# Altium PCB ISC.PcbDoc (part 2 of 3)
Units mm, origin at the board's own origin, x right, y up, seen from the top; angles counter-clockwise.
Board outline 152.4 x 101.6 mm, 2 copper layers (Top Layer, Bottom Layer); 689 components, 715 nets, 2378 pads, 0 vias.
Unrouted connection lines stored in the file: 1379.
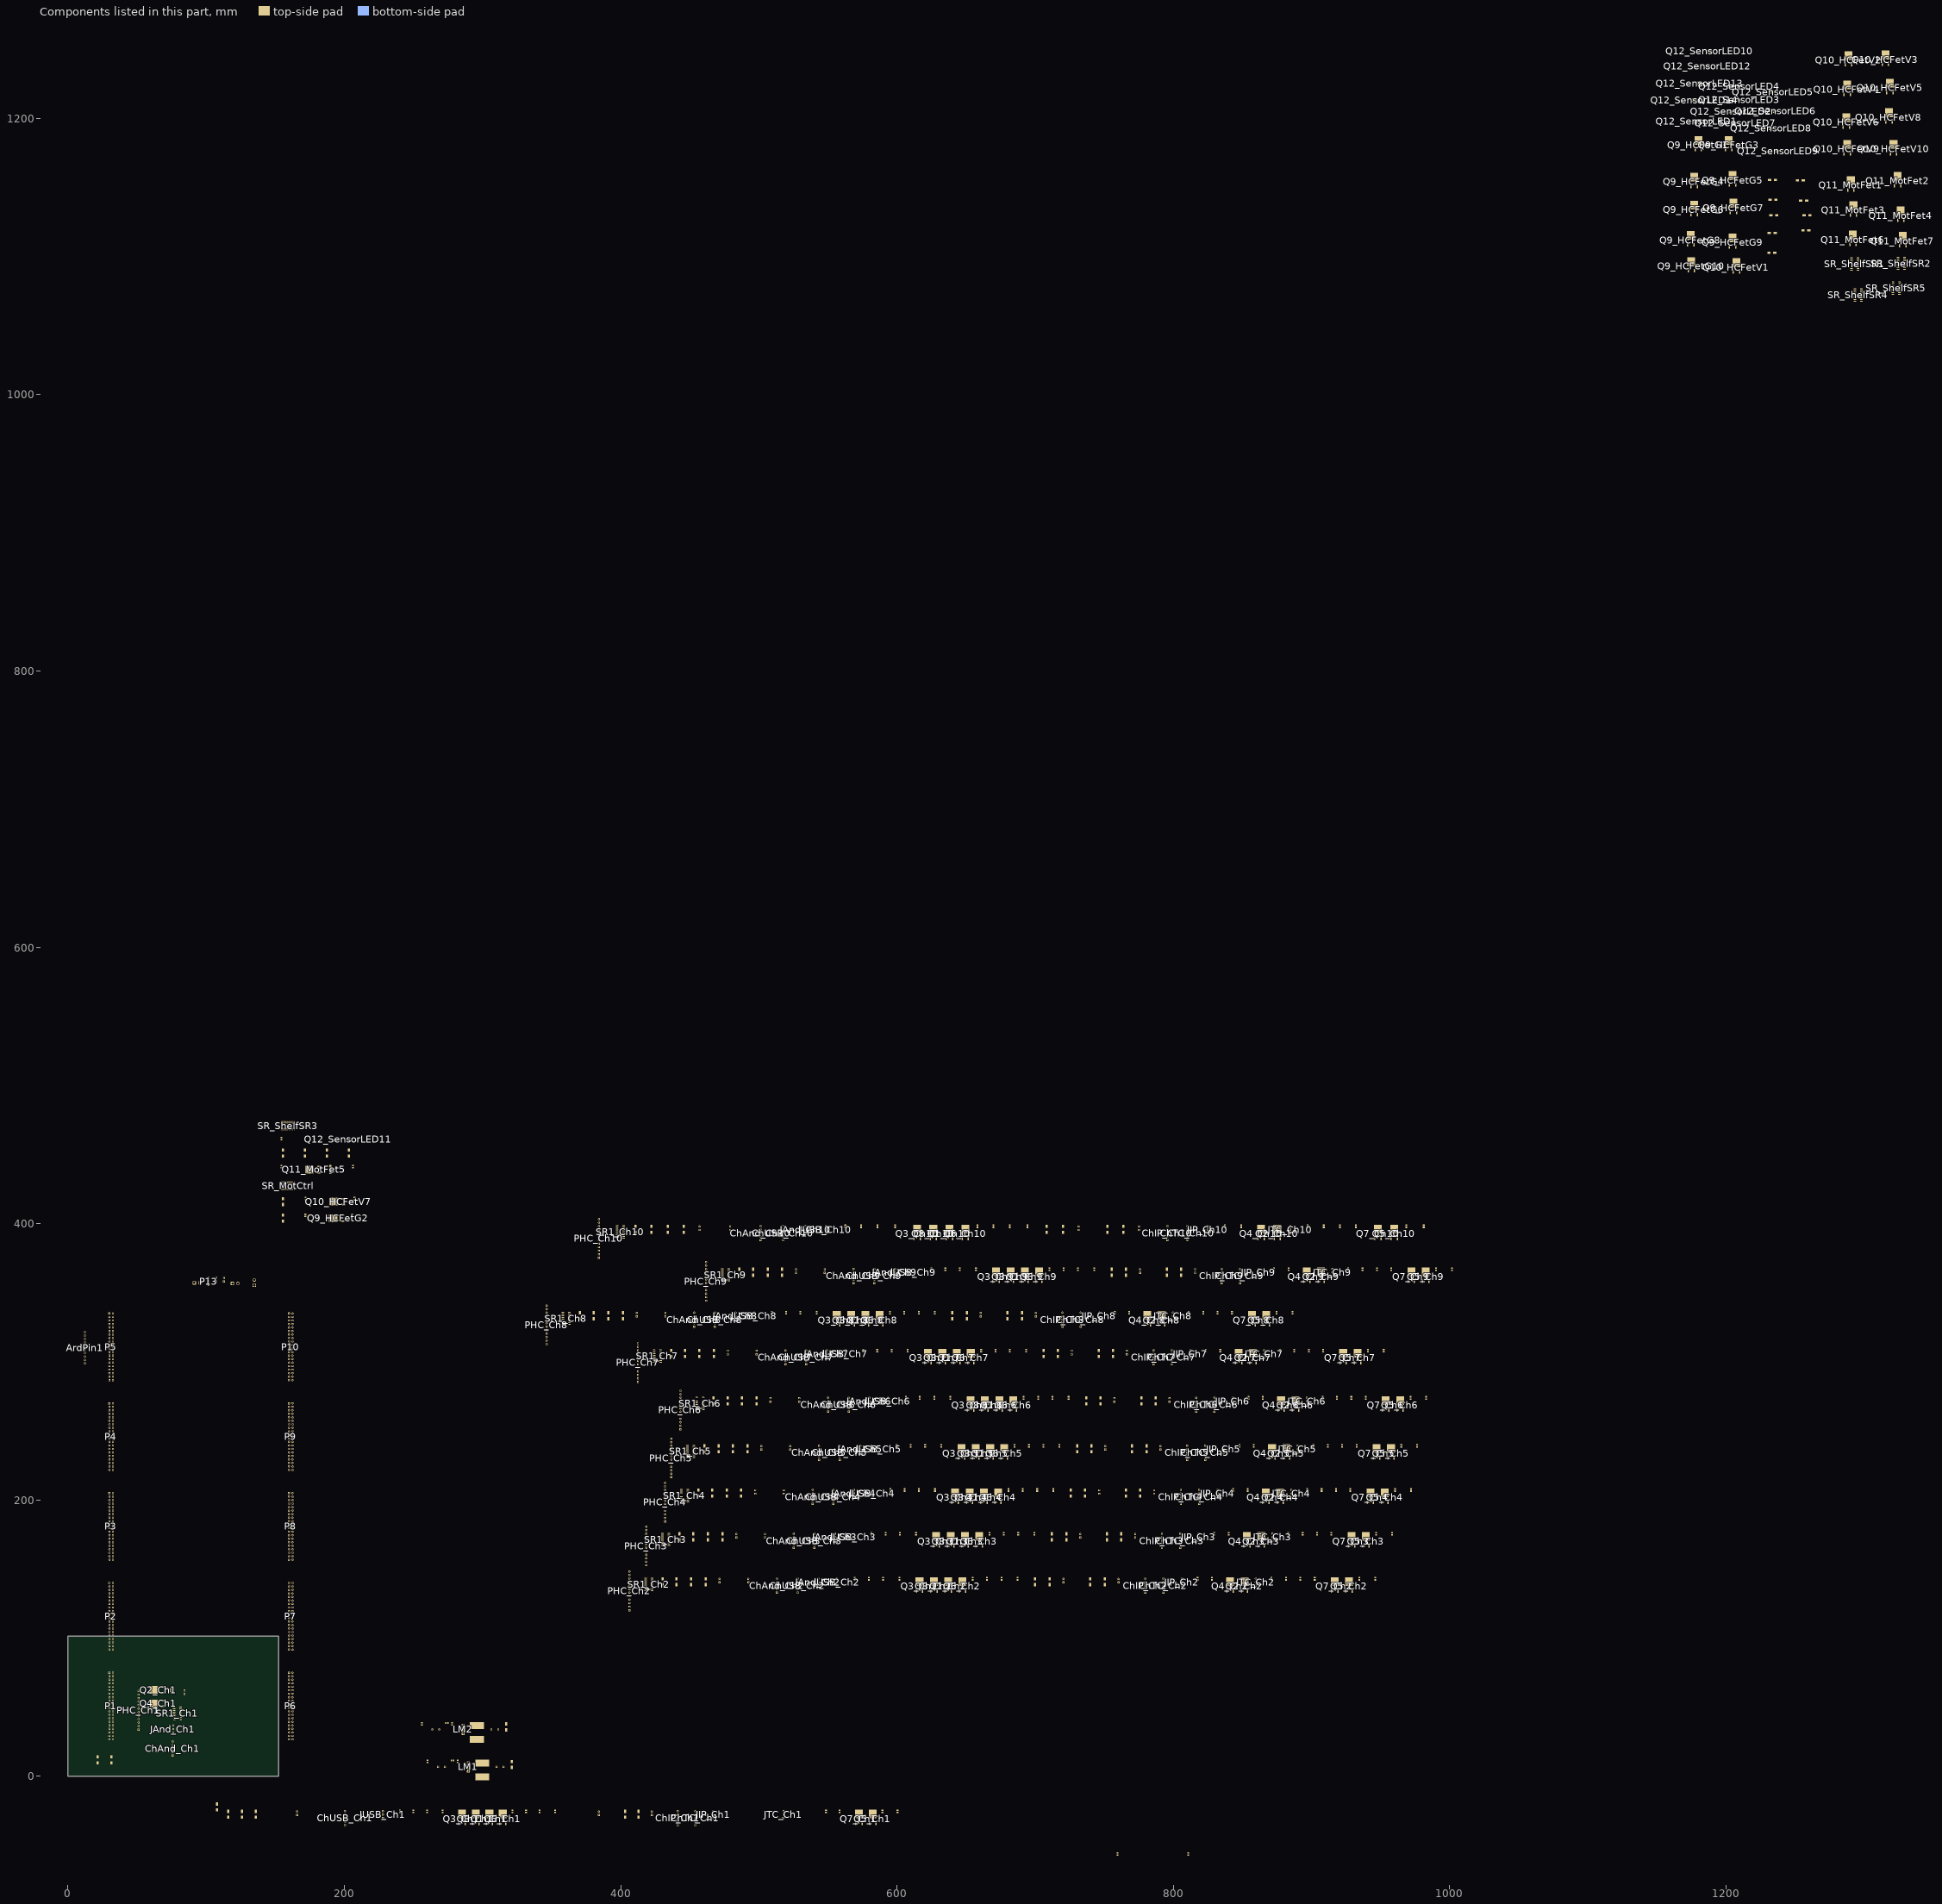
[diagram p2: the components of this part, seen from the top]

## Components (designator, comment, footprint, x,y, rotation, side; value= is the part's Value field where it differs from the comment) (continued)
P9 "Header 20X2" HDR2X20 160,270 r270 top locked
P10 "Header 20X2" HDR2X20 160,335 r270 top locked
P11 "Arduino5V" HDR1X2 112.984,358.22 r90 top
P12 "OrangePi5V" HDR1X2 107.396,358.22 r90 top
P13 "DriverJumper" HDR1X3 101.808,355.68 r90 top
PHC_Ch1 "Header 12" HDR1X12 51.2,33.8 r90 top (schematic designator PHC)
PHC_Ch2 "Header 12" HDR1X12 406.358,120.267 r90 top (schematic designator PHC)
PHC_Ch3 "Header 12" HDR1X12 418.472,152.767 r90 top (schematic designator PHC)
PHC_Ch4 "Header 12" HDR1X12 432.172,184.467 r90 top (schematic designator PHC)
PHC_Ch5 "Header 12" HDR1X12 436.675,216.452 r90 top (schematic designator PHC)
PHC_Ch6 "Header 12" HDR1X12 443.272,251.167 r90 top (schematic designator PHC)
PHC_Ch7 "Header 12" HDR1X12 412.472,285.467 r90 top (schematic designator PHC)
PHC_Ch8 "Header 12" HDR1X12 346.458,312.767 r90 top (schematic designator PHC)
PHC_Ch9 "Header 12" HDR1X12 461.793,344.3 r90 top (schematic designator PHC)
PHC_Ch10 "Header 12" HDR1X12 384.327,375.366 r90 top (schematic designator PHC)
Q1_Ch1 "PHD45N03" *DPAK228P998X235-3N 304.992,-29.718 r0 top (schematic designator Q1)
Q1_Ch2 "PHD45N03" *DPAK228P998X235-3N 637.117,138.555 r0 top (schematic designator Q1)
Q1_Ch3 "PHD45N03" *DPAK228P998X235-3N 649.231,171.055 r0 top (schematic designator Q1)
Q1_Ch4 "PHD45N03" *DPAK228P998X235-3N 662.931,202.755 r0 top (schematic designator Q1)
Q1_Ch5 "PHD45N03" *DPAK228P998X235-3N 667.434,234.74 r0 top (schematic designator Q1)
Q1_Ch6 "PHD45N03" *DPAK228P998X235-3N 674.031,269.455 r0 top (schematic designator Q1)
Q1_Ch7 "PHD45N03" *DPAK228P998X235-3N 643.231,303.755 r0 top (schematic designator Q1)
Q1_Ch8 "PHD45N03" *DPAK228P998X235-3N 577.217,331.055 r0 top (schematic designator Q1)
Q1_Ch9 "PHD45N03" *DPAK228P998X235-3N 692.552,362.588 r0 top (schematic designator Q1)
Q1_Ch10 "PHD45N03" *DPAK228P998X235-3N 637.946,393.654 r0 top (schematic designator Q1)
Q2_Ch1 "PHD45N03" *DPAK228P998X235-3N 64.5,62.6 r90 top (schematic designator Q2)
Q2_Ch2 "PHD45N03" *DPAK228P998X235-3N 851.493,138.555 r0 top (schematic designator Q2)
Q2_Ch3 "PHD45N03" *DPAK228P998X235-3N 863.607,171.055 r0 top (schematic designator Q2)
Q2_Ch4 "PHD45N03" *DPAK228P998X235-3N 877.307,202.755 r0 top (schematic designator Q2)
Q2_Ch5 "PHD45N03" *DPAK228P998X235-3N 881.81,234.74 r0 top (schematic designator Q2)
Q2_Ch6 "PHD45N03" *DPAK228P998X235-3N 888.407,269.455 r0 top (schematic designator Q2)
Q2_Ch7 "PHD45N03" *DPAK228P998X235-3N 857.607,303.755 r0 top (schematic designator Q2)
Q2_Ch8 "PHD45N03" *DPAK228P998X235-3N 791.593,331.055 r0 top (schematic designator Q2)
Q2_Ch9 "PHD45N03" *DPAK228P998X235-3N 906.928,362.588 r0 top (schematic designator Q2)
Q2_Ch10 "PHD45N03" *DPAK228P998X235-3N 875.182,393.654 r0 top (schematic designator Q2)
Q3_Ch1 "PHD45N03" *DPAK228P998X235-3N 285.18,-29.718 r0 top (schematic designator Q3)
Q3_Ch2 "PHD45N03" *DPAK228P998X235-3N 616.289,138.555 r0 top (schematic designator Q3)
Q3_Ch3 "PHD45N03" *DPAK228P998X235-3N 628.403,171.055 r0 top (schematic designator Q3)
Q3_Ch4 "PHD45N03" *DPAK228P998X235-3N 642.103,202.755 r0 top (schematic designator Q3)
Q3_Ch5 "PHD45N03" *DPAK228P998X235-3N 646.606,234.74 r0 top (schematic designator Q3)
Q3_Ch6 "PHD45N03" *DPAK228P998X235-3N 653.203,269.455 r0 top (schematic designator Q3)
Q3_Ch7 "PHD45N03" *DPAK228P998X235-3N 622.403,303.755 r0 top (schematic designator Q3)
Q3_Ch8 "PHD45N03" *DPAK228P998X235-3N 556.389,331.055 r0 top (schematic designator Q3)
Q3_Ch9 "PHD45N03" *DPAK228P998X235-3N 671.724,362.588 r0 top (schematic designator Q3)
Q3_Ch10 "PHD45N03" *DPAK228P998X235-3N 614.578,393.654 r0 top (schematic designator Q3)
Q4_Ch1 "PHD45N03" *DPAK228P998X235-3N 64.5,52.7 r90 top (schematic designator Q4)
Q4_Ch2 "PHD45N03" *DPAK228P998X235-3N 841.079,138.555 r0 top (schematic designator Q4)
Q4_Ch3 "PHD45N03" *DPAK228P998X235-3N 853.193,171.055 r0 top (schematic designator Q4)
Q4_Ch4 "PHD45N03" *DPAK228P998X235-3N 866.893,202.755 r0 top (schematic designator Q4)
Q4_Ch5 "PHD45N03" *DPAK228P998X235-3N 871.396,234.74 r0 top (schematic designator Q4)
Q4_Ch6 "PHD45N03" *DPAK228P998X235-3N 877.993,269.455 r0 top (schematic designator Q4)
Q4_Ch7 "PHD45N03" *DPAK228P998X235-3N 847.193,303.755 r0 top (schematic designator Q4)
Q4_Ch8 "PHD45N03" *DPAK228P998X235-3N 781.179,331.055 r0 top (schematic designator Q4)
Q4_Ch9 "PHD45N03" *DPAK228P998X235-3N 896.514,362.588 r0 top (schematic designator Q4)
Q4_Ch10 "PHD45N03" *DPAK228P998X235-3N 863.498,393.654 r0 top (schematic designator Q4)
Q5_Ch1 "PHD45N03" *DPAK228P998X235-3N 582.36,-29.718 r0 top (schematic designator Q5)
Q5_Ch2 "PHD45N03" *DPAK228P998X235-3N 927.185,138.555 r0 top (schematic designator Q5)
Q5_Ch3 "PHD45N03" *DPAK228P998X235-3N 939.299,171.055 r0 top (schematic designator Q5)
Q5_Ch4 "PHD45N03" *DPAK228P998X235-3N 952.999,202.755 r0 top (schematic designator Q5)
Q5_Ch5 "PHD45N03" *DPAK228P998X235-3N 957.502,234.74 r0 top (schematic designator Q5)
Q5_Ch6 "PHD45N03" *DPAK228P998X235-3N 964.099,269.455 r0 top (schematic designator Q5)
Q5_Ch7 "PHD45N03" *DPAK228P998X235-3N 933.299,303.755 r0 top (schematic designator Q5)
Q5_Ch8 "PHD45N03" *DPAK228P998X235-3N 867.285,331.055 r0 top (schematic designator Q5)
Q5_Ch9 "PHD45N03" *DPAK228P998X235-3N 982.62,362.588 r0 top (schematic designator Q5)
Q5_Ch10 "PHD45N03" *DPAK228P998X235-3N 959.764,393.654 r0 top (schematic designator Q5)
Q6_Ch1 "PHD45N03" *DPAK228P998X235-3N 314.644,-29.718 r0 top (schematic designator Q6)
Q6_Ch2 "PHD45N03" *DPAK228P998X235-3N 647.277,138.555 r0 top (schematic designator Q6)
Q6_Ch3 "PHD45N03" *DPAK228P998X235-3N 659.391,171.055 r0 top (schematic designator Q6)
Q6_Ch4 "PHD45N03" *DPAK228P998X235-3N 673.091,202.755 r0 top (schematic designator Q6)
Q6_Ch5 "PHD45N03" *DPAK228P998X235-3N 677.594,234.74 r0 top (schematic designator Q6)
Q6_Ch6 "PHD45N03" *DPAK228P998X235-3N 684.191,269.455 r0 top (schematic designator Q6)
Q6_Ch7 "PHD45N03" *DPAK228P998X235-3N 653.391,303.755 r0 top (schematic designator Q6)
Q6_Ch8 "PHD45N03" *DPAK228P998X235-3N 587.377,331.055 r0 top (schematic designator Q6)
Q6_Ch9 "PHD45N03" *DPAK228P998X235-3N 702.712,362.588 r0 top (schematic designator Q6)
Q6_Ch10 "PHD45N03" *DPAK228P998X235-3N 649.376,393.654 r0 top (schematic designator Q6)
Q7_Ch1 "PHD45N03" *DPAK228P998X235-3N 572.454,-29.718 r0 top (schematic designator Q7)
Q7_Ch2 "PHD45N03" *DPAK228P998X235-3N 916.771,138.555 r0 top (schematic designator Q7)
Q7_Ch3 "PHD45N03" *DPAK228P998X235-3N 928.885,171.055 r0 top (schematic designator Q7)
Q7_Ch4 "PHD45N03" *DPAK228P998X235-3N 942.585,202.755 r0 top (schematic designator Q7)
Q7_Ch5 "PHD45N03" *DPAK228P998X235-3N 947.088,234.74 r0 top (schematic designator Q7)
Q7_Ch6 "PHD45N03" *DPAK228P998X235-3N 953.685,269.455 r0 top (schematic designator Q7)
Q7_Ch7 "PHD45N03" *DPAK228P998X235-3N 922.885,303.755 r0 top (schematic designator Q7)
Q7_Ch8 "PHD45N03" *DPAK228P998X235-3N 856.871,331.055 r0 top (schematic designator Q7)
Q7_Ch9 "PHD45N03" *DPAK228P998X235-3N 972.206,362.588 r0 top (schematic designator Q7)
Q7_Ch10 "PHD45N03" *DPAK228P998X235-3N 948.08,393.654 r0 top (schematic designator Q7)
Q8_Ch1 "PHD45N03" *DPAK228P998X235-3N 295.086,-29.718 r0 top (schematic designator Q8)
Q8_Ch2 "PHD45N03" *DPAK228P998X235-3N 626.703,138.555 r0 top (schematic designator Q8)
Q8_Ch3 "PHD45N03" *DPAK228P998X235-3N 638.817,171.055 r0 top (schematic designator Q8)
Q8_Ch4 "PHD45N03" *DPAK228P998X235-3N 652.517,202.755 r0 top (schematic designator Q8)
Q8_Ch5 "PHD45N03" *DPAK228P998X235-3N 657.02,234.74 r0 top (schematic designator Q8)
Q8_Ch6 "PHD45N03" *DPAK228P998X235-3N 663.617,269.455 r0 top (schematic designator Q8)
Q8_Ch7 "PHD45N03" *DPAK228P998X235-3N 632.817,303.755 r0 top (schematic designator Q8)
Q8_Ch8 "PHD45N03" *DPAK228P998X235-3N 566.803,331.055 r0 top (schematic designator Q8)
Q8_Ch9 "PHD45N03" *DPAK228P998X235-3N 682.138,362.588 r0 top (schematic designator Q8)
Q8_Ch10 "PHD45N03" *DPAK228P998X235-3N 626.262,393.654 r0 top (schematic designator Q8)
Q9_HCFetG1 "PHD45N03" *DPAK228P998X235-3N 1179.944,1181.595 r0 top (schematic designator Q9)
Q9_HCFetG2 "PHD45N03" *DPAK228P998X235-3N 194.437,403.987 r90 top (schematic designator Q9)
Q9_HCFetG3 "PHD45N03" *DPAK228P998X235-3N 1201.915,1181.595 r0 top (schematic designator Q9)
Q9_HCFetG4 "PHD45N03" *DPAK228P998X235-3N 1176.896,1155.052 r0 top (schematic designator Q9)
Q9_HCFetG5 "PHD45N03" *DPAK228P998X235-3N 1204.709,1156.068 r0 top (schematic designator Q9)
Q9_HCFetG6 "PHD45N03" *DPAK228P998X235-3N 1176.896,1134.732 r0 top (schematic designator Q9)
Q9_HCFetG7 "PHD45N03" *DPAK228P998X235-3N 1205.344,1136.129 r0 top (schematic designator Q9)
Q9_HCFetG8 "PHD45N03" *DPAK228P998X235-3N 1174.356,1112.761 r0 top (schematic designator Q9)
Q9_HCFetG9 "PHD45N03" *DPAK228P998X235-3N 1204.709,1111.11 r0 top (schematic designator Q9)
Q9_HCFetG10 "PHD45N03" *DPAK228P998X235-3N 1174.864,1093.965 r0 top (schematic designator Q9)
Q10_HCFetV1 "PHD45N03" *DPAK228P998X235-3N 1207.503,1093.076 r0 top (schematic designator Q10)
Q10_HCFetV2 "PHD45N03" *DPAK228P998X235-3N 1288.656,1243.063 r0 top (schematic designator Q10)
Q10_HCFetV3 "PHD45N03" *DPAK228P998X235-3N 1315.326,1243.444 r0 top (schematic designator Q10)
Q10_HCFetV4 "PHD45N03" *DPAK228P998X235-3N 1287.589,1221.74 r0 top (schematic designator Q10)
Q10_HCFetV5 "PHD45N03" *DPAK228P998X235-3N 1318.577,1223.01 r0 top (schematic designator Q10)
Q10_HCFetV6 "PHD45N03" *DPAK228P998X235-3N 1287.081,1198.118 r0 top (schematic designator Q10)
Q10_HCFetV7 "PHD45N03" *DPAK228P998X235-3N 194.945,415.925 r90 top (schematic designator Q10)
Q10_HCFetV8 "PHD45N03" *DPAK228P998X235-3N 1317.866,1201.661 r0 top (schematic designator Q10)
Q10_HCFetV9 "PHD45N03" *DPAK228P998X235-3N 1287.589,1178.687 r0 top (schematic designator Q10)
Q10_HCFetV10 "PHD45N03" *DPAK228P998X235-3N 1321.168,1178.674 r0 top (schematic designator Q10)
Q11_MotFet1 "PHD45N03" *DPAK228P998X235-3N 1290.307,1152.512 r0 top (schematic designator Q11)
Q11_MotFet2 "PHD45N03" *DPAK228P998X235-3N 1324.165,1155.573 r0 top (schematic designator Q11)
Q11_MotFet3 "PHD45N03" *DPAK228P998X235-3N 1292.161,1134.364 r0 top (schematic designator Q11)
Q11_MotFet4 "PHD45N03" *DPAK228P998X235-3N 1326.451,1130.554 r0 top (schematic designator Q11)
Q11_MotFet5 "PHD45N03" *DPAK228P998X235-3N 177.165,439.166 r90 top (schematic designator Q11)
Q11_MotFet6 "PHD45N03" *DPAK228P998X235-3N 1291.831,1113.015 r0 top (schematic designator Q11)
Q11_MotFet7 "PHD45N03" *DPAK228P998X235-3N 1327.899,1112.126 r0 top (schematic designator Q11)
Q12_SensorLED1 "s9018" SOT-23_N 1178.547,1197.724 r0 top (schematic designator Q12)
Q12_SensorLED2 "s9018" SOT-23_N 1203.693,1204.963 r0 top (schematic designator Q12)
Q12_SensorLED3 "s9018" SOT-23_N 1209.408,1213.345 r0 top (schematic designator Q12)
Q12_SensorLED4 "s9018" SOT-23_N 1209.408,1222.997 r0 top (schematic designator Q12)
Q12_SensorLED5 "s9018" SOT-23_N 1233.919,1219.06 r0 top (schematic designator Q12)
Q12_SensorLED6 "s9018" SOT-23_N 1235.697,1205.217 r0 top (schematic designator Q12)
Q12_SensorLED7 "s9018" SOT-23_N 1206.868,1196.708 r0 top (schematic designator Q12)
Q12_SensorLED8 "s9018" SOT-23_N 1232.649,1192.771 r0 top (schematic designator Q12)
Q12_SensorLED9 "s9018" SOT-23_N 1237.602,1176.388 r0 top (schematic designator Q12)
Q12_SensorLED10 "s9018" SOT-23_N 1187.945,1248.651 r0 top (schematic designator Q12)
Q12_SensorLED11 "s9018" SOT-23_N 202.565,461.137 r90 top (schematic designator Q12)
Q12_SensorLED12 "s9018" SOT-23_N 1186.548,1237.602 r0 top (schematic designator Q12)
Q12_SensorLED13 "s9018" SOT-23_N 1180.833,1225.41 r0 top (schematic designator Q12)
Q12_SensorLED14 "s9018" SOT-23_N 1177.023,1213.218 r0 top (schematic designator Q12)
R1_Ch1 "R100" 6-0805_L 240.349,-25.273 r90 top value=100 (schematic designator R1)
R1_Ch2 "R100" 6-0805_L 569.426,143 r90 top value=100 (schematic designator R1)
R1_Ch3 "R100" 6-0805_L 581.54,175.5 r90 top value=100 (schematic designator R1)
R1_Ch4 "R100" 6-0805_L 595.24,207.2 r90 top value=100 (schematic designator R1)
R1_Ch5 "R100" 6-0805_L 599.743,239.185 r90 top value=100 (schematic designator R1)
R1_Ch6 "R100" 6-0805_L 606.34,273.9 r90 top value=100 (schematic designator R1)
R1_Ch7 "R100" 6-0805_L 575.54,308.2 r90 top value=100 (schematic designator R1)
R1_Ch8 "R100" 6-0805_L 509.526,335.5 r90 top value=100 (schematic designator R1)
R1_Ch9 "R100" 6-0805_L 624.861,367.033 r90 top value=100 (schematic designator R1)
R1_Ch10 "R100" 6-0805_L 562.635,398.099 r90 top value=100 (schematic designator R1)
R2_Ch1 "R100" 6-0805_L 72.5,52.6 r90 top value=100 (schematic designator R2)
R2_Ch2 "R100" 6-0805_L 817.457,143 r90 top value=100 (schematic designator R2)
R2_Ch3 "R100" 6-0805_L 829.571,175.5 r90 top value=100 (schematic designator R2)
R2_Ch4 "R100" 6-0805_L 843.271,207.2 r90 top value=100 (schematic designator R2)
R2_Ch5 "R100" 6-0805_L 847.774,239.185 r90 top value=100 (schematic designator R2)
R2_Ch6 "R100" 6-0805_L 854.371,273.9 r90 top value=100 (schematic designator R2)
R2_Ch7 "R100" 6-0805_L 823.571,308.2 r90 top value=100 (schematic designator R2)
R2_Ch8 "R100" 6-0805_L 757.557,335.5 r90 top value=100 (schematic designator R2)
R2_Ch9 "R100" 6-0805_L 872.892,367.033 r90 top value=100 (schematic designator R2)
R2_Ch10 "R100" 6-0805_L 837.336,398.099 r90 top value=100 (schematic designator R2)
R3_Ch1 "R430" 6-0805_L 321.629,-25.273 r90 top value=430 (schematic designator R3)
R3_Ch2 "R430" 6-0805_L 654.77,143 r90 top value=430 (schematic designator R3)
R3_Ch3 "R430" 6-0805_L 666.884,175.5 r90 top value=430 (schematic designator R3)
R3_Ch4 "R430" 6-0805_L 680.584,207.2 r90 top value=430 (schematic designator R3)
R3_Ch5 "R430" 6-0805_L 685.087,239.185 r90 top value=430 (schematic designator R3)
R3_Ch6 "R430" 6-0805_L 691.684,273.9 r90 top value=430 (schematic designator R3)
R3_Ch7 "R430" 6-0805_L 660.884,308.2 r90 top value=430 (schematic designator R3)
R3_Ch8 "R430" 6-0805_L 594.87,335.5 r90 top value=430 (schematic designator R3)
R3_Ch9 "R430" 6-0805_L 710.205,367.033 r90 top value=430 (schematic designator R3)
R3_Ch10 "R430" 6-0805_L 658.139,398.099 r90 top value=430 (schematic designator R3)
R4_Ch1 "R430" 6-0805_L 74.3,62.3 r270 top value=430 (schematic designator R4)
R4_Ch2 "R430" 6-0805_L 871.051,143 r90 top value=430 (schematic designator R4)
R4_Ch3 "R430" 6-0805_L 883.165,175.5 r90 top value=430 (schematic designator R4)
R4_Ch4 "R430" 6-0805_L 896.865,207.2 r90 top value=430 (schematic designator R4)
R4_Ch5 "R430" 6-0805_L 901.368,239.185 r90 top value=430 (schematic designator R4)
R4_Ch6 "R430" 6-0805_L 907.965,273.9 r90 top value=430 (schematic designator R4)
R4_Ch7 "R430" 6-0805_L 877.165,308.2 r90 top value=430 (schematic designator R4)
R4_Ch8 "R430" 6-0805_L 811.151,335.5 r90 top value=430 (schematic designator R4)
R4_Ch9 "R430" 6-0805_L 926.486,367.033 r90 top value=430 (schematic designator R4)
R4_Ch10 "R430" 6-0805_L 897.28,398.099 r90 top value=430 (schematic designator R4)
R5_Ch1 "R100" 6-0805_L 250.001,-25.273 r90 top value=100 (schematic designator R5)
R5_Ch2 "R100" 6-0805_L 579.586,143 r90 top value=100 (schematic designator R5)
R5_Ch3 "R100" 6-0805_L 591.7,175.5 r90 top value=100 (schematic designator R5)
R5_Ch4 "R100" 6-0805_L 605.4,207.2 r90 top value=100 (schematic designator R5)
R5_Ch5 "R100" 6-0805_L 609.903,239.185 r90 top value=100 (schematic designator R5)
R5_Ch6 "R100" 6-0805_L 616.5,273.9 r90 top value=100 (schematic designator R5)
R5_Ch7 "R100" 6-0805_L 585.7,308.2 r90 top value=100 (schematic designator R5)
R5_Ch8 "R100" 6-0805_L 519.686,335.5 r90 top value=100 (schematic designator R5)
R5_Ch9 "R100" 6-0805_L 635.021,367.033 r90 top value=100 (schematic designator R5)
R5_Ch10 "R100" 6-0805_L 574.065,398.099 r90 top value=100 (schematic designator R5)
R6_Ch1 "R100" 6-0805_L 759.702,-56.3 r90 top value=100 (schematic designator R6)
R6_Ch2 "R100" 6-0805_L 827.871,143 r90 top value=100 (schematic designator R6)
R6_Ch3 "R100" 6-0805_L 839.985,175.5 r90 top value=100 (schematic designator R6)
R6_Ch4 "R100" 6-0805_L 853.685,207.2 r90 top value=100 (schematic designator R6)
R6_Ch5 "R100" 6-0805_L 858.188,239.185 r90 top value=100 (schematic designator R6)
R6_Ch6 "R100" 6-0805_L 864.785,273.9 r90 top value=100 (schematic designator R6)
R6_Ch7 "R100" 6-0805_L 833.985,308.2 r90 top value=100 (schematic designator R6)
R6_Ch8 "R100" 6-0805_L 767.971,335.5 r90 top value=100 (schematic designator R6)
R6_Ch9 "R100" 6-0805_L 883.306,367.033 r90 top value=100 (schematic designator R6)
R6_Ch10 "R100" 6-0805_L 849.02,398.099 r90 top value=100 (schematic designator R6)
R7_Ch1 "R430" 6-0805_L 331.535,-25.273 r90 top value=430 (schematic designator R7)
R7_Ch2 "R430" 6-0805_L 665.184,143 r90 top value=430 (schematic designator R7)
R7_Ch3 "R430" 6-0805_L 677.298,175.5 r90 top value=430 (schematic designator R7)
R7_Ch4 "R430" 6-0805_L 690.998,207.2 r90 top value=430 (schematic designator R7)
R7_Ch5 "R430" 6-0805_L 695.501,239.185 r90 top value=430 (schematic designator R7)
R7_Ch6 "R430" 6-0805_L 702.098,273.9 r90 top value=430 (schematic designator R7)
R7_Ch7 "R430" 6-0805_L 671.298,308.2 r90 top value=430 (schematic designator R7)
R7_Ch8 "R430" 6-0805_L 605.284,335.5 r90 top value=430 (schematic designator R7)
R7_Ch9 "R430" 6-0805_L 720.619,367.033 r90 top value=430 (schematic designator R7)
R7_Ch10 "R430" 6-0805_L 669.823,398.099 r90 top value=430 (schematic designator R7)
R8_Ch1 "R430" 6-0805_L 810.756,-56.3 r90 top value=430 (schematic designator R8)
R8_Ch2 "R430" 6-0805_L 881.465,143 r90 top value=430 (schematic designator R8)
R8_Ch3 "R430" 6-0805_L 893.579,175.5 r90 top value=430 (schematic designator R8)
R8_Ch4 "R430" 6-0805_L 907.279,207.2 r90 top value=430 (schematic designator R8)
R8_Ch5 "R430" 6-0805_L 911.782,239.185 r90 top value=430 (schematic designator R8)
R8_Ch6 "R430" 6-0805_L 918.379,273.9 r90 top value=430 (schematic designator R8)
R8_Ch7 "R430" 6-0805_L 887.579,308.2 r90 top value=430 (schematic designator R8)
R8_Ch8 "R430" 6-0805_L 821.565,335.5 r90 top value=430 (schematic designator R8)
R8_Ch9 "R430" 6-0805_L 936.9,367.033 r90 top value=430 (schematic designator R8)
R8_Ch10 "R430" 6-0805_L 908.837,398.099 r90 top value=430 (schematic designator R8)
R9_Ch1 "R100" 6-0805_L 548.578,-25.273 r90 top value=100 (schematic designator R9)
R9_Ch2 "R100" 6-0805_L 891.879,143 r90 top value=100 (schematic designator R9)
R9_Ch3 "R100" 6-0805_L 903.993,175.5 r90 top value=100 (schematic designator R9)
R9_Ch4 "R100" 6-0805_L 917.693,207.2 r90 top value=100 (schematic designator R9)
R9_Ch5 "R100" 6-0805_L 922.196,239.185 r90 top value=100 (schematic designator R9)
R9_Ch6 "R100" 6-0805_L 928.793,273.9 r90 top value=100 (schematic designator R9)
R9_Ch7 "R100" 6-0805_L 897.993,308.2 r90 top value=100 (schematic designator R9)
R9_Ch8 "R100" 6-0805_L 831.979,335.5 r90 top value=100 (schematic designator R9)
R9_Ch9 "R100" 6-0805_L 947.314,367.033 r90 top value=100 (schematic designator R9)
R9_Ch10 "R100" 6-0805_L 920.521,398.099 r90 top value=100 (schematic designator R9)
R10_Ch1 "R100" 6-0805_L 259.907,-25.273 r90 top value=100 (schematic designator R10)
R10_Ch2 "R100" 6-0805_L 590,143 r90 top value=100 (schematic designator R10)
R10_Ch3 "R100" 6-0805_L 602.114,175.5 r90 top value=100 (schematic designator R10)
R10_Ch4 "R100" 6-0805_L 615.814,207.2 r90 top value=100 (schematic designator R10)
R10_Ch5 "R100" 6-0805_L 620.317,239.185 r90 top value=100 (schematic designator R10)
R10_Ch6 "R100" 6-0805_L 626.914,273.9 r90 top value=100 (schematic designator R10)
R10_Ch7 "R100" 6-0805_L 596.114,308.2 r90 top value=100 (schematic designator R10)
R10_Ch8 "R100" 6-0805_L 530.1,335.5 r90 top value=100 (schematic designator R10)
R10_Ch9 "R100" 6-0805_L 645.435,367.033 r90 top value=100 (schematic designator R10)
R10_Ch10 "R100" 6-0805_L 585.749,398.099 r90 top value=100 (schematic designator R10)
R11_Ch1 "R430" 6-0805_L 589.472,-25.273 r90 top value=430 (schematic designator R11)
R11_Ch2 "R430" 6-0805_L 934.678,143 r90 top value=430 (schematic designator R11)
R11_Ch3 "R430" 6-0805_L 946.792,175.5 r90 top value=430 (schematic designator R11)
R11_Ch4 "R430" 6-0805_L 960.492,207.2 r90 top value=430 (schematic designator R11)
R11_Ch5 "R430" 6-0805_L 964.995,239.185 r90 top value=430 (schematic designator R11)
R11_Ch6 "R430" 6-0805_L 971.592,273.9 r90 top value=430 (schematic designator R11)
R11_Ch7 "R430" 6-0805_L 940.792,308.2 r90 top value=430 (schematic designator R11)
R11_Ch8 "R430" 6-0805_L 874.778,335.5 r90 top value=430 (schematic designator R11)
R11_Ch9 "R430" 6-0805_L 990.113,367.033 r90 top value=430 (schematic designator R11)
R11_Ch10 "R430" 6-0805_L 968.527,398.099 r90 top value=430 (schematic designator R11)
R12_Ch1 "R430" 6-0805_L 341.441,-25.273 r90 top value=430 (schematic designator R12)
R12_Ch2 "R430" 6-0805_L 675.598,143 r90 top value=430 (schematic designator R12)
R12_Ch3 "R430" 6-0805_L 687.712,175.5 r90 top value=430 (schematic designator R12)
R12_Ch4 "R430" 6-0805_L 701.412,207.2 r90 top value=430 (schematic designator R12)
R12_Ch5 "R430" 6-0805_L 705.915,239.185 r90 top value=430 (schematic designator R12)
R12_Ch6 "R430" 6-0805_L 712.512,273.9 r90 top value=430 (schematic designator R12)
R12_Ch7 "R430" 6-0805_L 681.712,308.2 r90 top value=430 (schematic designator R12)
R12_Ch8 "R430" 6-0805_L 615.698,335.5 r90 top value=430 (schematic designator R12)
R12_Ch9 "R430" 6-0805_L 731.033,367.033 r90 top value=430 (schematic designator R12)
R12_Ch10 "R430" 6-0805_L 681.507,398.099 r90 top value=430 (schematic designator R12)
R13_Ch1 "R100" 6-0805_L 558.484,-25.273 r90 top value=100 (schematic designator R13)
R13_Ch2 "R100" 6-0805_L 902.293,143 r90 top value=100 (schematic designator R13)
R13_Ch3 "R100" 6-0805_L 914.407,175.5 r90 top value=100 (schematic designator R13)
R13_Ch4 "R100" 6-0805_L 928.107,207.2 r90 top value=100 (schematic designator R13)
R13_Ch5 "R100" 6-0805_L 932.61,239.185 r90 top value=100 (schematic designator R13)
R13_Ch6 "R100" 6-0805_L 939.207,273.9 r90 top value=100 (schematic designator R13)
R13_Ch7 "R100" 6-0805_L 908.407,308.2 r90 top value=100 (schematic designator R13)
R13_Ch8 "R100" 6-0805_L 842.393,335.5 r90 top value=100 (schematic designator R13)
R13_Ch9 "R100" 6-0805_L 957.728,367.033 r90 top value=100 (schematic designator R13)
R13_Ch10 "R100" 6-0805_L 932.205,398.099 r90 top value=100 (schematic designator R13)
R14_Ch1 "R100" 6-0805_L 271.083,-25.273 r90 top value=100 (schematic designator R14)
R14_Ch2 "R100" 6-0805_L 601.684,143 r90 top value=100 (schematic designator R14)
R14_Ch3 "R100" 6-0805_L 613.798,175.5 r90 top value=100 (schematic designator R14)
R14_Ch4 "R100" 6-0805_L 627.498,207.2 r90 top value=100 (schematic designator R14)
R14_Ch5 "R100" 6-0805_L 632.001,239.185 r90 top value=100 (schematic designator R14)
R14_Ch6 "R100" 6-0805_L 638.598,273.9 r90 top value=100 (schematic designator R14)
R14_Ch7 "R100" 6-0805_L 607.798,308.2 r90 top value=100 (schematic designator R14)
R14_Ch8 "R100" 6-0805_L 541.784,335.5 r90 top value=100 (schematic designator R14)
R14_Ch9 "R100" 6-0805_L 657.119,367.033 r90 top value=100 (schematic designator R14)
R14_Ch10 "R100" 6-0805_L 598.703,398.099 r90 top value=100 (schematic designator R14)
R15_Ch1 "R430" 6-0805_L 600.394,-25.273 r90 top value=430 (schematic designator R15)
R15_Ch2 "R430" 6-0805_L 946.108,143 r90 top value=430 (schematic designator R15)
R15_Ch3 "R430" 6-0805_L 958.222,175.5 r90 top value=430 (schematic designator R15)
R15_Ch4 "R430" 6-0805_L 971.922,207.2 r90 top value=430 (schematic designator R15)
R15_Ch5 "R430" 6-0805_L 976.425,239.185 r90 top value=430 (schematic designator R15)
R15_Ch6 "R430" 6-0805_L 983.022,273.9 r90 top value=430 (schematic designator R15)
R15_Ch7 "R430" 6-0805_L 952.222,308.2 r90 top value=430 (schematic designator R15)
R15_Ch8 "R430" 6-0805_L 886.208,335.5 r90 top value=430 (schematic designator R15)
R15_Ch9 "R430" 6-0805_L 1001.543,367.033 r90 top value=430 (schematic designator R15)
R15_Ch10 "R430" 6-0805_L 981.227,398.099 r90 top value=430 (schematic designator R15)
R16_Ch1 "R430" 6-0805_L 352.617,-25.273 r90 top value=430 (schematic designator R16)
R16_Ch2 "R430" 6-0805_L 687.282,143 r90 top value=430 (schematic designator R16)
R16_Ch3 "R430" 6-0805_L 699.396,175.5 r90 top value=430 (schematic designator R16)
R16_Ch4 "R430" 6-0805_L 713.096,207.2 r90 top value=430 (schematic designator R16)
R16_Ch5 "R430" 6-0805_L 717.599,239.185 r90 top value=430 (schematic designator R16)
R16_Ch6 "R430" 6-0805_L 724.196,273.9 r90 top value=430 (schematic designator R16)
R16_Ch7 "R430" 6-0805_L 693.396,308.2 r90 top value=430 (schematic designator R16)
R16_Ch8 "R430" 6-0805_L 627.382,335.5 r90 top value=430 (schematic designator R16)
R16_Ch9 "R430" 6-0805_L 742.717,367.033 r90 top value=430 (schematic designator R16)
R16_Ch10 "R430" 6-0805_L 694.461,398.099 r90 top value=430 (schematic designator R16)
R17 "1k" 6-0805_L 260.136,10.795 r90 top
R18 "1k68" 6-0805_L 281.98,10.795 r90 top
R19 "1k" 6-0805_L 256.072,37.973 r90 top
R20 "1k68" 6-0805_L 277.916,37.973 r90 top
R21_HCFetG1 "R100" 6-0805_L 1179.944,1181.595 r0 top value=100 (schematic designator R21)
R21_HCFetG2 "R100" 6-0805_L 171.831,406.146 r90 top value=100 (schematic designator R21)
R21_HCFetG3 "R100" 6-0805_L 1201.915,1181.595 r0 top value=100 (schematic designator R21)
R21_HCFetG4 "R100" 6-0805_L 1176.896,1155.052 r0 top value=100 (schematic designator R21)
R21_HCFetG5 "R100" 6-0805_L 1204.709,1156.068 r0 top value=100 (schematic designator R21)
R21_HCFetG6 "R100" 6-0805_L 1176.896,1134.732 r0 top value=100 (schematic designator R21)
R21_HCFetG7 "R100" 6-0805_L 1205.344,1136.129 r0 top value=100 (schematic designator R21)
R21_HCFetG8 "R100" 6-0805_L 1174.356,1112.761 r0 top value=100 (schematic designator R21)
R21_HCFetG9 "R100" 6-0805_L 1204.709,1111.11 r0 top value=100 (schematic designator R21)
R21_HCFetG10 "R100" 6-0805_L 1174.864,1093.965 r0 top value=100 (schematic designator R21)
R22_HCFetG1 "R430" 6-0805_L 1179.944,1181.595 r0 top value=430 (schematic designator R22)
R22_HCFetG2 "R430" 6-0805_L 205.613,406.146 r90 top value=430 (schematic designator R22)
R22_HCFetG3 "R430" 6-0805_L 1201.915,1181.595 r0 top value=430 (schematic designator R22)
R22_HCFetG4 "R430" 6-0805_L 1176.896,1155.052 r0 top value=430 (schematic designator R22)
R22_HCFetG5 "R430" 6-0805_L 1204.709,1156.068 r0 top value=430 (schematic designator R22)
R22_HCFetG6 "R430" 6-0805_L 1176.896,1134.732 r0 top value=430 (schematic designator R22)
R22_HCFetG7 "R430" 6-0805_L 1205.344,1136.129 r0 top value=430 (schematic designator R22)
R22_HCFetG8 "R430" 6-0805_L 1174.356,1112.761 r0 top value=430 (schematic designator R22)
R22_HCFetG9 "R430" 6-0805_L 1204.709,1111.11 r0 top value=430 (schematic designator R22)
R22_HCFetG10 "R430" 6-0805_L 1174.864,1093.965 r0 top value=430 (schematic designator R22)
R23_HCFetV1 "R100" 6-0805_L 1207.503,1093.076 r0 top value=100 (schematic designator R23)
R23_HCFetV2 "R100" 6-0805_L 1288.656,1243.063 r0 top value=100 (schematic designator R23)
R23_HCFetV3 "R100" 6-0805_L 1315.326,1243.444 r0 top value=100 (schematic designator R23)
R23_HCFetV4 "R100" 6-0805_L 1287.589,1221.74 r0 top value=100 (schematic designator R23)
R23_HCFetV5 "R100" 6-0805_L 1318.577,1223.01 r0 top value=100 (schematic designator R23)
R23_HCFetV6 "R100" 6-0805_L 1287.081,1198.118 r0 top value=100 (schematic designator R23)
R23_HCFetV7 "R100" 6-0805_L 172.085,418.084 r90 top value=100 (schematic designator R23)
R23_HCFetV8 "R100" 6-0805_L 1317.866,1201.661 r0 top value=100 (schematic designator R23)
R23_HCFetV9 "R100" 6-0805_L 1287.589,1178.687 r0 top value=100 (schematic designator R23)
R23_HCFetV10 "R100" 6-0805_L 1321.168,1178.674 r0 top value=100 (schematic designator R23)
R24_HCFetV1 "R430" 6-0805_L 1207.503,1093.076 r0 top value=430 (schematic designator R24)
R24_HCFetV2 "R430" 6-0805_L 1288.656,1243.063 r0 top value=430 (schematic designator R24)
R24_HCFetV3 "R430" 6-0805_L 1315.326,1243.444 r0 top value=430 (schematic designator R24)
R24_HCFetV4 "R430" 6-0805_L 1287.589,1221.74 r0 top value=430 (schematic designator R24)
R24_HCFetV5 "R430" 6-0805_L 1318.577,1223.01 r0 top value=430 (schematic designator R24)
R24_HCFetV6 "R430" 6-0805_L 1287.081,1198.118 r0 top value=430 (schematic designator R24)
R24_HCFetV7 "R430" 6-0805_L 207.391,418.084 r90 top value=430 (schematic designator R24)
R24_HCFetV8 "R430" 6-0805_L 1317.866,1201.661 r0 top value=430 (schematic designator R24)
R24_HCFetV9 "R430" 6-0805_L 1287.589,1178.687 r0 top value=430 (schematic designator R24)
R24_HCFetV10 "R430" 6-0805_L 1321.168,1178.674 r0 top value=430 (schematic designator R24)
R25_MotFet1 "R100" 6-0805_L 1290.307,1152.512 r0 top value=100 (schematic designator R25)
R25_MotFet2 "R100" 6-0805_L 1324.165,1155.573 r0 top value=100 (schematic designator R25)
R25_MotFet3 "R100" 6-0805_L 1292.161,1134.364 r0 top value=100 (schematic designator R25)
R25_MotFet4 "R100" 6-0805_L 1326.451,1130.554 r0 top value=100 (schematic designator R25)
R25_MotFet5 "R100" 6-0805_L 154.559,441.325 r90 top value=100 (schematic designator R25)
R25_MotFet6 "R100" 6-0805_L 1291.831,1113.015 r0 top value=100 (schematic designator R25)
R25_MotFet7 "R100" 6-0805_L 1327.899,1112.126 r0 top value=100 (schematic designator R25)
R26_MotFet1 "R430" 6-0805_L 1290.307,1152.512 r0 top value=430 (schematic designator R26)
R26_MotFet2 "R430" 6-0805_L 1324.165,1155.573 r0 top value=430 (schematic designator R26)
R26_MotFet3 "R430" 6-0805_L 1292.161,1134.364 r0 top value=430 (schematic designator R26)
R26_MotFet4 "R430" 6-0805_L 1326.451,1130.554 r0 top value=430 (schematic designator R26)
R26_MotFet5 "R430" 6-0805_L 206.375,441.325 r90 top value=430 (schematic designator R26)
R26_MotFet6 "R430" 6-0805_L 1291.831,1113.015 r0 top value=430 (schematic designator R26)
R26_MotFet7 "R430" 6-0805_L 1327.899,1112.126 r0 top value=430 (schematic designator R26)
R27_SensorLED1 "R4k7" 6-0805_L 1178.547,1197.724 r0 top value=4k7 (schematic designator R27)
R27_SensorLED2 "R4k7" 6-0805_L 1203.693,1204.963 r0 top value=4k7 (schematic designator R27)
R27_SensorLED3 "R4k7" 6-0805_L 1209.408,1213.345 r0 top value=4k7 (schematic designator R27)
R27_SensorLED4 "R4k7" 6-0805_L 1209.408,1222.997 r0 top value=4k7 (schematic designator R27)
R27_SensorLED5 "R4k7" 6-0805_L 1233.919,1219.06 r0 top value=4k7 (schematic designator R27)
R27_SensorLED6 "R4k7" 6-0805_L 1235.697,1205.217 r0 top value=4k7 (schematic designator R27)
R27_SensorLED7 "R4k7" 6-0805_L 1206.868,1196.708 r0 top value=4k7 (schematic designator R27)
R27_SensorLED8 "R4k7" 6-0805_L 1232.649,1192.771 r0 top value=4k7 (schematic designator R27)
R27_SensorLED9 "R4k7" 6-0805_L 1237.602,1176.388 r0 top value=4k7 (schematic designator R27)
R27_SensorLED10 "R4k7" 6-0805_L 1187.945,1248.651 r0 top value=4k7 (schematic designator R27)
R27_SensorLED11 "R4k7" 6-0805_L 177.927,461.645 r90 top value=4k7 (schematic designator R27)
R27_SensorLED12 "R4k7" 6-0805_L 1186.548,1237.602 r0 top value=4k7 (schematic designator R27)
R27_SensorLED13 "R4k7" 6-0805_L 1180.833,1225.41 r0 top value=4k7 (schematic designator R27)
R27_SensorLED14 "R4k7" 6-0805_L 1177.023,1213.218 r0 top value=4k7 (schematic designator R27)
R28_SensorLED1 "R2k2" 6-0805_L 1178.547,1197.724 r0 top value=2k2 (schematic designator R28)
R28_SensorLED2 "R2k2" 6-0805_L 1203.693,1204.963 r0 top value=2k2 (schematic designator R28)
R28_SensorLED3 "R2k2" 6-0805_L 1209.408,1213.345 r0 top value=2k2 (schematic designator R28)
R28_SensorLED4 "R2k2" 6-0805_L 1209.408,1222.997 r0 top value=2k2 (schematic designator R28)
R28_SensorLED5 "R2k2" 6-0805_L 1233.919,1219.06 r0 top value=2k2 (schematic designator R28)
R28_SensorLED6 "R2k2" 6-0805_L 1235.697,1205.217 r0 top value=2k2 (schematic designator R28)
R28_SensorLED7 "R2k2" 6-0805_L 1206.868,1196.708 r0 top value=2k2 (schematic designator R28)
R28_SensorLED8 "R2k2" 6-0805_L 1232.649,1192.771 r0 top value=2k2 (schematic designator R28)
R28_SensorLED9 "R2k2" 6-0805_L 1237.602,1176.388 r0 top value=2k2 (schematic designator R28)
R28_SensorLED10 "R2k2" 6-0805_L 1187.945,1248.651 r0 top value=2k2 (schematic designator R28)
R28_SensorLED11 "R2k2" 6-0805_L 154.559,461.645 r90 top value=2k2 (schematic designator R28)
R28_SensorLED12 "R2k2" 6-0805_L 1186.548,1237.602 r0 top value=2k2 (schematic designator R28)
R28_SensorLED13 "R2k2" 6-0805_L 1180.833,1225.41 r0 top value=2k2 (schematic designator R28)
R28_SensorLED14 "R2k2" 6-0805_L 1177.023,1213.218 r0 top value=2k2 (schematic designator R28)
SR1_Ch1 "74HC595 Shift Register" SO-16_L 79.3,45.7 r0 top value=8bit (schematic designator SR1)
SR1_Ch2 "74HC595 Shift Register" SO-16_L 420.455,138.936 r0 top value=8bit (schematic designator SR1)
SR1_Ch3 "74HC595 Shift Register" SO-16_L 432.569,171.436 r0 top value=8bit (schematic designator SR1)
SR1_Ch4 "74HC595 Shift Register" SO-16_L 446.269,203.136 r0 top value=8bit (schematic designator SR1)
SR1_Ch5 "74HC595 Shift Register" SO-16_L 450.772,235.121 r0 top value=8bit (schematic designator SR1)
SR1_Ch6 "74HC595 Shift Register" SO-16_L 457.369,269.836 r0 top value=8bit (schematic designator SR1)
SR1_Ch7 "74HC595 Shift Register" SO-16_L 426.569,304.136 r0 top value=8bit (schematic designator SR1)
SR1_Ch8 "74HC595 Shift Register" SO-16_L 360.555,331.436 r0 top value=8bit (schematic designator SR1)
SR1_Ch9 "74HC595 Shift Register" SO-16_L 475.89,362.969 r0 top value=8bit (schematic designator SR1)
SR1_Ch10 "74HC595 Shift Register" SO-16_L 399.694,394.035 r0 top value=8bit (schematic designator SR1)
SR_MotCtrl "74HC595 Shift Register" SO-16_L 159.258,427.355 r90 top value=8bit (schematic designator SR)
SR_ShelfSR1 "74HC595 Shift Register" SO-16_L 1293.228,1094.6 r0 top value=8bit (schematic designator SR)
SR_ShelfSR2 "74HC595 Shift Register" SO-16_L 1326.832,1094.994 r0 top value=8bit (schematic designator SR)
SR_ShelfSR3 "74HC595 Shift Register" SO-16_L 159.258,470.916 r90 top value=8bit (schematic designator SR)
SR_ShelfSR4 "74HC595 Shift Register" SO-16_L 1295.641,1072.121 r0 top value=8bit (schematic designator SR)
SR_ShelfSR5 "74HC595 Shift Register" SO-16_L 1323.2,1077.074 r0 top value=8bit (schematic designator SR)

## Footprints (in the part's own frame and the unit in brackets; to place one, negate y for a bottom-side part, rotate by r counter-clockwise, add the part's x,y. Pads: shape width x height; smd on the part's side, far side on the other; paste and mask are expansions set on the pad)
6-0805_L [mm] "Chip Resistor, Body 2.0x1.2mm, IPC High Density"
  rect 1x1.3 smd: 1(-0.8,0) 2(0.8,0)
  silkscreen extent 0,-0.55 0,0.55, body extent -1.07,-0.7 1.07,0.7, height 0.7
*DIOM5227X270N_S1M(Primary) [mm]
  rect 2.33x1.56 smd: A(2.14,0) C(-2.14,0)
  silkscreen extent -3.85,-1.48 2.8,1.48
*DPAK228P998X235-3N [mm]
  rect 0.94x2.52 smd: 1(-2.28,-4.34) 3(2.28,-4.34)
  rect 5.67x6.23 smd: 2(0,2.48)
  silkscreen extent -3.52,-4.42 3.33,4.2
*TE_6-1123723-2 [mm]
  rect 2.475x2.475 hole 1.65: 1(-1.98,0)
  round 2.475 hole 1.65: 2(1.98,0)
  silkscreen extent -3.93,-4.8 3.93,4.8
HDR1X2 [mm] "Connector; Header; 2 Position"
  rect 1.5x1.5 hole 0.9: 1(0,0)
  round 1.5 hole 0.9: 2(2.54,0)
  silkscreen extent -1.27,-1.27 3.81,1.27
HDR1X3 [mm] "Connector; Header; 3 Position"
  rect 1.5x1.5 hole 0.9: 1(0,0)
  round 1.5 hole 0.9: 2(2.54,0) 3(5.08,0)
  silkscreen extent -1.27,-1.27 6.35,1.27
HDR1X5 [mm] "Connector; Header; 5 Position"
  rect 1.5x1.5 hole 0.9: 1(0,0)
  round 1.5 hole 0.9: 2(2.54,0) 3(5.08,0) 4(7.62,0) 5(10.16,0)
  silkscreen extent -1.27,-1.27 11.43,1.27
HDR1X10 [mm] "Connector; Header; 10 Position"
  rect 1.5x1.5 hole 0.9: 1(0,0)
  round 1.5 hole 0.9: 2(2.54,0) 3(5.08,0) 4(7.62,0) 5(10.16,0) 6(12.7,0) 7(15.24,0) 8(17.78,0) 9(20.32,0) 10(22.86,0)
  silkscreen extent -1.27,-1.27 24.13,1.27
HDR1X12 [mm] "Connector; Header; 12 Position"
  rect 1.5x1.5 hole 0.9: 1(0,0)
  round 1.5 hole 0.9: 2(2.54,0) 3(5.08,0) 4(7.62,0) 5(10.16,0) 6(12.7,0) 7(15.24,0) 8(17.78,0) 9(20.32,0) 10(22.86,0) 11(25.4,0) 12(27.94,0)
  silkscreen extent -1.27,-1.27 29.21,1.27
HDR2X20 [mm] "Connector; Header; 20x2 Position"
  rect 1.5x1.5 hole 0.9: 1(0,0)
  round 1.5 hole 0.9: 2(0,2.54) 3(2.54,0) 4(2.54,2.54) 5(5.08,0) 6(5.08,2.54) 7(7.62,0) 8(7.62,2.54) 9(10.16,0) 10(10.16,2.54) 11(12.7,0) 12(12.7,2.54) 13(15.24,0) 14(15.24,2.54) 15(17.78,0) 16(17.78,2.54) 17(20.32,0) 18(20.32,2.54) 19(22.86,0) 20(22.86,2.54) 21(25.4,0) 22(25.4,2.54) 23(27.94,0) 24(27.94,2.54) 25(30.48,0) 26(30.48,2.54) 27(33.02,0) 28(33.02,2.54) 29(35.56,0) 30(35.56,2.54) 31(38.1,0) 32(38.1,2.54) 33(40.64,0) 34(40.64,2.54) 35(43.18,0) 36(43.18,2.54) 37(45.72,0) 38(45.72,2.54) 39(48.26,0) 40(48.26,2.54)
  silkscreen extent -1.27,-1.27 49.53,3.81
IND_SMD-13.0mm [mm]
  rect 5x10 smd: 1(-5.08,-0.127) 2(5.08,-0.127)
  Top Layer keep-out lines w0.2: -2.6,5.55 2.45,5.55 ; -1.55,5.55 -1.55,-5.8 ; 1.45,5.5 1.45,-5.75 ; -2.65,-5.8 2.65,-5.8
  silkscreen extent -6.35,-6.22 6.35,6.35, body extent -6.2,-6.3 6.3,6.2, height 6.1
RB5-10.5 [mm] "Capacitor (Radial); 2 Leads"
  round 1.5 hole 0.9: 1(-2.5,0) 2(2.5,0)
  silkscreen extent -5.25,-5.25 5.25,5.25
SO-16_L [mm] "SOIC, 16-Leads, Body 9.9x3.9mm, Pitch 1.27mm, IPC High Density"
  oval 1.9x0.6 smd: 1(-2.35,4.445) 2(-2.35,3.175) 3(-2.35,1.905) 4(-2.35,0.635) 5(-2.35,-0.635) 6(-2.35,-1.905) 7(-2.35,-3.175) 8(-2.35,-4.445) 9(2.35,-4.445) 10(2.35,-3.175) 11(2.35,-1.905) 12(2.35,-0.635) 13(2.35,0.635) 14(2.35,1.905) 15(2.35,3.175) 16(2.35,4.445)
  silkscreen extent -2.47,-5 1,5.42, body extent -2,-5 2,5, height 1.75
SOT-23_N [mm] "SOT23, 3-Leads, Body 2.9x1.3mm, Pitch 0.95mm, Lead Span 2.5mm, IPC Medium Density"
  rect 1.15x0.6 smd: 1(-1.125,0.95) 2(-1.125,-0.95) 3(1.125,0)
  silkscreen extent -1.25,-1.5 0.7,1.92, body extent -0.7,-1.5 0.7,1.5, height 1.1
T05A [mm] "TO, Thru-Hole, Vertical, Heatsink Mounted; 5 In-Line Leads; Pitch 1.70 mm"
  rect 1.4x2 hole 1.1: 1(-3.4,0)
  oval 1.4x2 hole 1.1: 2(-1.7,0) 3(0,0) 4(1.7,0) 5(3.4,0)
  silkscreen extent -5.3,-2.1 5.3,2.8, body extent -5.35,-2.15 5.35,2.85, height 15.9

## Text inside footprints (layer, text, board x,y; h text height)
P1: Top Overlay "1" at 29.492,77.54 h1.27 r270; Top Overlay "2" at 32.032,77.54 h1.27 r270; Top Overlay "40" at 32.032,24.708 h1.27 r270; Top Overlay "39" at 29.492,24.708 h1.27 r270
P2: Top Overlay "1" at 29.492,142.54 h1.27 r270; Top Overlay "2" at 32.032,142.54 h1.27 r270; Top Overlay "40" at 32.032,89.708 h1.27 r270; Top Overlay "39" at 29.492,89.708 h1.27 r270
P3: Top Overlay "1" at 29.492,207.54 h1.27 r270; Top Overlay "2" at 32.032,207.54 h1.27 r270; Top Overlay "40" at 32.032,154.708 h1.27 r270; Top Overlay "39" at 29.492,154.708 h1.27 r270
P4: Top Overlay "1" at 29.492,272.54 h1.27 r270; Top Overlay "2" at 32.032,272.54 h1.27 r270; Top Overlay "40" at 32.032,219.708 h1.27 r270; Top Overlay "39" at 29.492,219.708 h1.27 r270
P5: Top Overlay "1" at 29.492,337.54 h1.27 r270; Top Overlay "2" at 32.032,337.54 h1.27 r270; Top Overlay "40" at 32.032,284.708 h1.27 r270; Top Overlay "39" at 29.492,284.708 h1.27 r270
P6: Top Overlay "1" at 159.492,77.54 h1.27 r270; Top Overlay "2" at 162.032,77.54 h1.27 r270; Top Overlay "40" at 162.032,24.708 h1.27 r270; Top Overlay "39" at 159.492,24.708 h1.27 r270
P7: Top Overlay "1" at 159.492,142.54 h1.27 r270; Top Overlay "2" at 162.032,142.54 h1.27 r270; Top Overlay "40" at 162.032,89.708 h1.27 r270; Top Overlay "39" at 159.492,89.708 h1.27 r270
P8: Top Overlay "1" at 159.492,207.54 h1.27 r270; Top Overlay "2" at 162.032,207.54 h1.27 r270; Top Overlay "40" at 162.032,154.708 h1.27 r270; Top Overlay "39" at 159.492,154.708 h1.27 r270
P9: Top Overlay "1" at 159.492,272.54 h1.27 r270; Top Overlay "2" at 162.032,272.54 h1.27 r270; Top Overlay "40" at 162.032,219.708 h1.27 r270; Top Overlay "39" at 159.492,219.708 h1.27 r270
P10: Top Overlay "1" at 159.492,337.54 h1.27 r270; Top Overlay "2" at 162.032,337.54 h1.27 r270; Top Overlay "40" at 162.032,284.708 h1.27 r270; Top Overlay "39" at 159.492,284.708 h1.27 r270